# Altium PCB EMFI.PcbDoc
Units mm, origin at the board's own origin, x right, y up, seen from the top; angles counter-clockwise.
Board outline 128.02 x 45.55 mm, 2 copper layers (Top Layer, Bottom Layer); 90 components, 45 nets, 281 pads, 210 vias.
Unrouted connection lines stored in the file: 48.
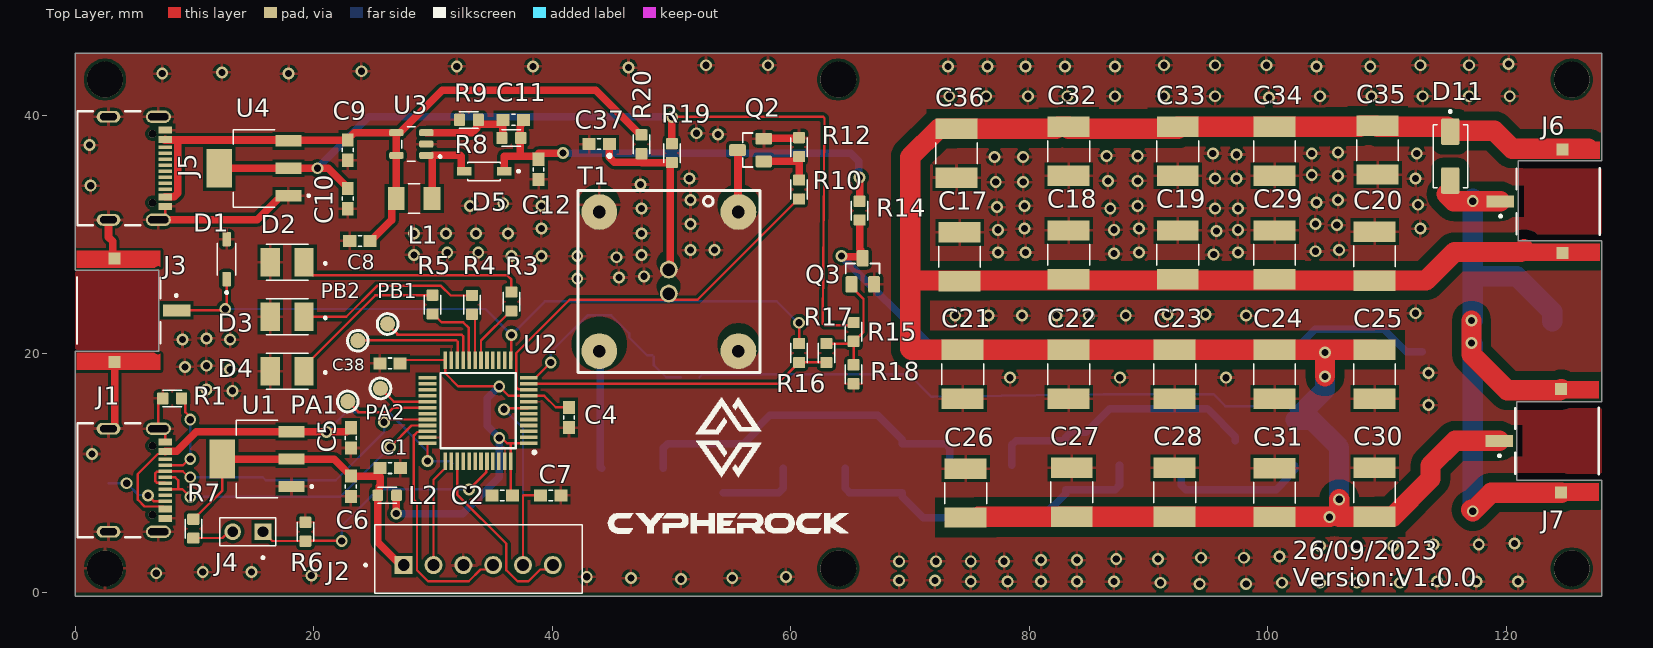
[diagram p0: Top Layer view]
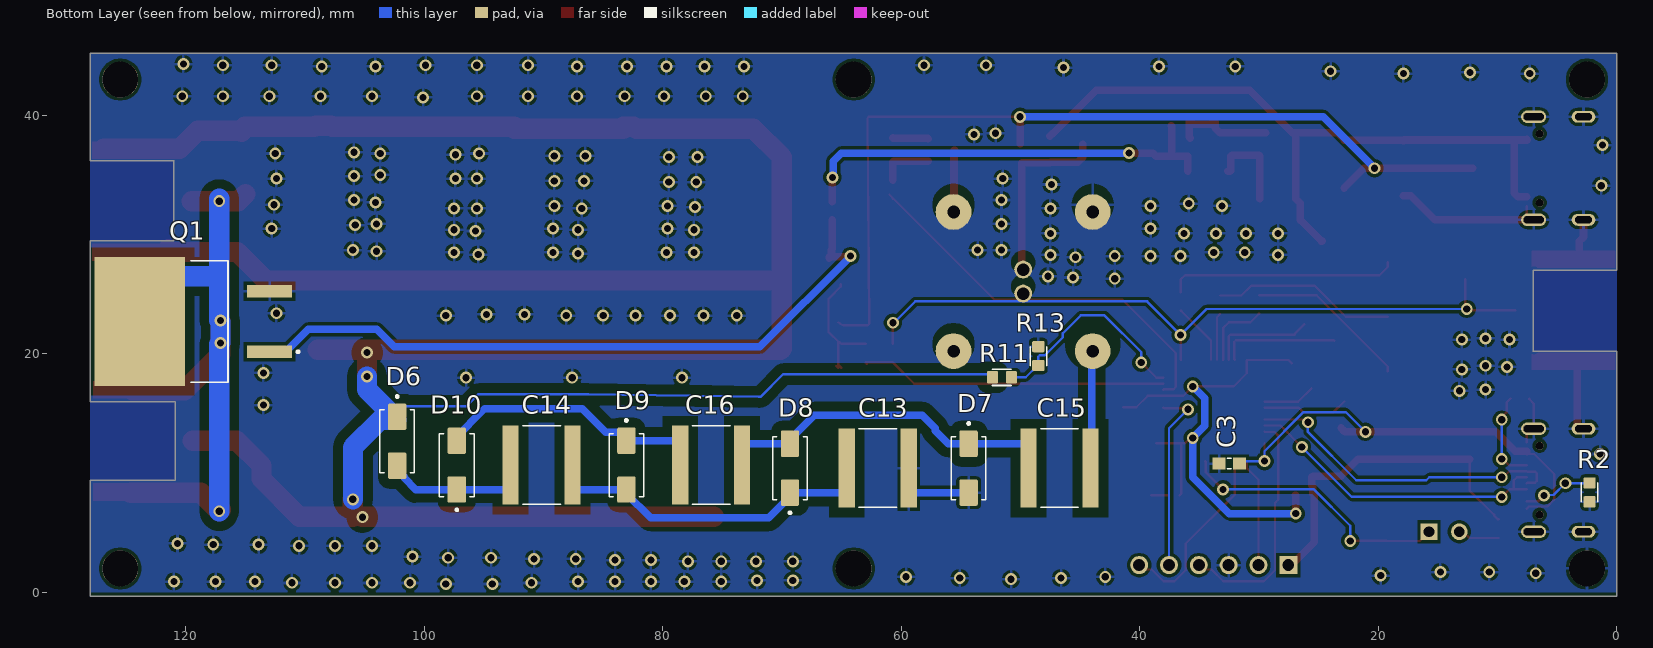
[diagram p1: Bottom Layer view, seen from below]
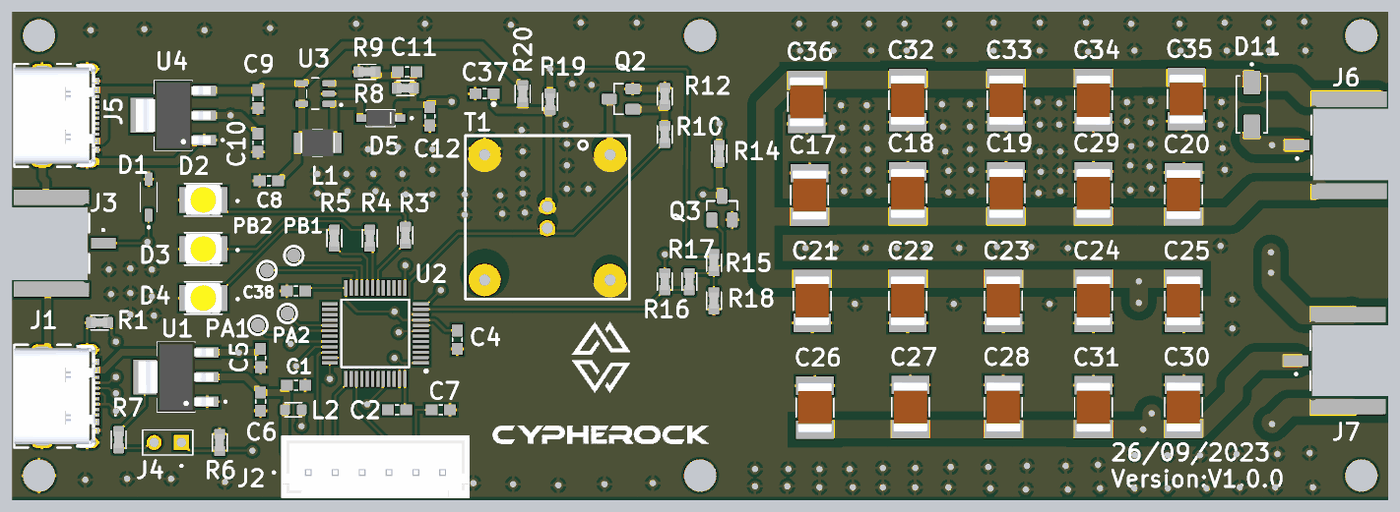
[diagram p2: 3D render of the assembled board from above, using the file's embedded part models]

## Layer stack, top to bottom
Top Solder: solder mask 0.0102, Solder Resist, Dk 3.5
Top Layer: signal copper 0.0356
Dielectric 1: dielectric 0.32, FR-4, Dk 4.8
Bottom Layer: signal copper 0.0356
Bottom Solder: solder mask 0.0102, Solder Resist, Dk 3.5

## Board outline
128.016,16 120.9,16 120.9,9.4 128.016,9.4 128.016,-0.339 0,-0.339 0,20.2 7,20.2 7,27 0,27 0,45.212 128.016,45.212 128.016,36.2 121,36.2 121,29.5 128.016,29.5

## Design rules (kind name [scope] priority, off if disabled: settings)
Clearance Clearance_2 [(InNet('NetC13_2') OR InNet('NetC14_2') OR InNet('NetC16_2') OR InNet('NetC15_2')  OR InNet('NetC15_1')  OR InNet('NetD11_A'))] p1: gap=0.8 ignorepadtopadclearanceinfootprint=FALSE
Clearance Clearance_1 [InNet('HV')] p2: gap=0.8 ignorepadtopadclearanceinfootprint=FALSE
Clearance [All] p3: gap=0.254 ignorepadtopadclearanceinfootprint=FALSE except(0: Arc-Hole Track-Hole SMDPad-Hole THPad-Hole Via-Hole Fill-Hole Poly-Hole Region-Hole Text-Hole; 0.15: Arc-SMDPad Track-SMDPad SMDPad-SMDPad; 0.2: Arc-Arc Arc-Track Track-Track)
ComponentClearance [All] p1: gap=0 collisioncheckmode=3 verticalgap=0.254 showdistances=FALSE
PlaneClearance [All] p1: clearance=0.8
PolygonConnect [All] p1: connectstyle=Relief reliefconductorwidth=0.254 reliefentries=4 polygonreliefangle="90 Angle" airgapwidth=0.254
RoutingVias [All] p1: holewidth=0.711 width=1.27 viastyle="Through Hole" minholewidth=0.711 minwidth=1.27 maxholewidth=0.711 maxwidth=1.27
SolderMaskExpansion [All] p1: expansion=0.102 istentingtop=FALSE
Width [All] p1: maxlimit=1.7 minlimit=0.2 preferedwidth=0.635 minimp=50.000000 maximp=50.000000 favimp=50.000000
28 further rules are at their usual default settings.

## Classes and differential pairs
component class Power: C8 C9 C10 C11 C12 C13 C14 C15 C16 C17 C18 C19 C20 C21 C22 C23 C24 C25 C26 C27 C28 C29 C30 C31 C32 C33 C34 C35 C36 C37 D5 D6 D7 D8 D9 D10 D11 J5 J6 J7 L1 Q1 Q2 Q3 R8 R9 R10 R11 R12 R13 R14 R15 R16 R17 R18 R19 R20 T1 U3 U4
component class Controller: C1 C2 C3 C4 C5 C6 C7 C38 D1 D2 D3 D4 J1 J2 J3 J4 L2 PA1 PA2 PB1 PB2 R1 R2 R3 R4 R5 R6 R7 U1 U2

## Components (designator, comment, footprint, x,y, rotation, side; value= is the part's Value field where it differs from the comment)
C1 "4.7uF/16V" CAPC1608X90 26.416,10.414 r0 top
C2 "1uF/16V" CAPC1608X90 35.814,8.128 r180 top
C3 "1uF/16V" CAPC1608X90 32.5,10.8 r0 bottom
C4 "1uF/16V" CAPC1608X90 41.41,14.664 r270 top
C5 "10uF/16V" CAPC1608X90 23.114,12.954 r270 top
C6 "10uF/16V" CAPC1608X90 23.114,8.89 r270 top
C7 "10uF/16V" CAPC1608X90 39.878,8.128 r0 top
C8 "10uF/16V" CAPC1608X90 23.876,29.464 r180 top
C9 "10uF/16V" CAPC1608X90 22.86,37.084 r270 top
C10 "10uF/16V" CAPC1608X90 22.86,33.02 r270 top
C11 "4.7pF/16V" CAPC1608X90 36.742,39.624 r180 top
C12 "4.7uF/16V" CAPC1608X90 38.862,35.472 r270 top
C13 "0.15uF/1000V" CAPC5563X218N 61.976,10.414 r0 bottom
C14 "0.15uF/1000V" CAPC5563X218N 90.17,10.668 r0 bottom
C15 "0.15uF/1000V" CAPC5563X218N 46.736,10.414 r0 bottom
C16 "0.15uF/1000V" CAPC5563X218N 75.946,10.668 r0 bottom
C17 "0.1uF/1000V" CAPC4632X221N 74.168,28.14 r270 top
C18 "0.1uF/1000V" CAPC4632X221N 83.312,28.294 r270 top
C19 "0.1uF/1000V" CAPC4632X221N 92.456,28.294 r270 top
C20 "0.1uF/1000V" CAPC4632X221N 108.966,28.194 r270 top
C21 "0.1uF/1000V" CAPC4632X221N 74.422,18.288 r90 top
C22 "0.1uF/1000V" CAPC4632X221N 83.312,18.288 r90 top
C23 "0.1uF/1000V" CAPC4632X221N 92.202,18.288 r90 top
C24 "0.1uF/1000V" CAPC4632X221N 100.584,18.288 r90 top
C25 "0.1uF/1000V" CAPC4632X221N 108.966,18.288 r90 top
C26 "0.1uF/1000V" CAPC4632X221N 74.676,8.328 r270 top
C27 "0.1uF/1000V" CAPC4632X221N 83.566,8.382 r270 top
C28 "0.1uF/1000V" CAPC4632X221N 92.202,8.382 r270 top
C29 "0.1uF/1000V" CAPC4632X221N 100.584,28.294 r270 top
C30 "0.1uF/1000V" CAPC4632X221N 108.966,8.382 r270 top
C31 "0.1uF/1000V" CAPC4632X221N 100.584,8.364 r270 top
C32 "0.1uF/1000V" CAPC4632X221N 83.312,36.984 r90 top
C33 "0.1uF/1000V" CAPC4632X221N 92.456,36.984 r90 top
C34 "0.1uF/1000V" CAPC4632X221N 100.584,36.984 r90 top
C35 "0.1uF/1000V" CAPC4632X221N 109.22,37.084 r90 top
C36 "0.1uF/1000V" CAPC4632X221N 73.914,36.83 r90 top
C37 "100uF/6.3V" CAPC1608X90 43.942,37.592 r180 top
C38 "1uF/16V" CAPC1608X90 26.4,19.2 r180 top
D1 "BZT52-C3V3" SOD3715X145N#1 12.7,27.94 r90 top
D2 "AA3528LSECKT/J4" LED_OF-SMD3528WC 17.78,27.686 r180 top
D3 "AA3528LSECKT/J4" LED_OF-SMD3528WC 17.78,23.114 r180 top
D4 "AA3528LSECKT/J4" LED_OF-SMD3528WC 17.78,18.542 r180 top
D5 "MBR0530T1G" SOD3715X145N#2 34.29,35.306 r180 top
D6 "M7" DIOM505270X240 102.278,12.668 r270 bottom
D7 "M7" DIOM505270X240 54.356,10.414 r270 bottom
D8 "M7" DIOM505270X240 69.342,10.414 r90 bottom
D9 "M7" DIOM505270X240 83.058,10.668 r270 bottom
D10 "M7" DIOM505270X240 97.282,10.668 r90 bottom
D11 "M7" DIOM505270X240 115.316,36.576 r270 top
J1 "USB4105-GF-A" GCT_USB4105-GF-A 2.794,9.398 r270 top
J2 "B6B-XH-A(LF)(SN)" JST_B6B-XH-A(LF)(SN) 33.802,2.811 r0 top
J3 "SMA-J-P-X-ST-EM3" SAMTEC_SMA-J-P-X-ST-EM3 0.152,23.644 r270 top
J4 "87224-2" TE_87224-2 14.478,5.08 r180 top
J5 "USB4105-GF-A" GCT_USB4105-GF-A 2.794,35.56 r270 top
J6 "SMA-J-P-X-ST-EM3" SAMTEC_SMA-J-P-X-ST-EM3 127.864,32.788 r90 top
J7 "SMA-J-P-X-ST-EM3" SAMTEC_SMA-J-P-X-ST-EM3 127.762,12.7 r90 top
L1 "6.8uH" INDM3225X240N 28.429,33.02 r180 top
L2 "MPZ1608S102ATD25" INDC1608X95N 26.162,8.128 r0 top
PA1 "5019" KEYSTONE_5019 22.86,16.002 r0 top
PA2 "5019" KEYSTONE_5019 25.6,17.1 r90 top
PB1 "5019" KEYSTONE_5019 26.2,22.5 r0 top
PB2 "5019" KEYSTONE_5019 23.7,21.1 r90 top
Q1 "IXGA30N120B3" TO254P1524X483-3N 119.38,22.708 r0 bottom
Q2 "IRLML6344TRPBF" SOT23 56.642,37.084 r90 top
Q3 "IRLML6344TRPBF" SOT23 66.04,26.924 r0 top
R1 "4.75k/0.1W" RESC1608X50N 8.128,16.256 r180 top
R2 "4.75k/0.1W" RESC1608X50N 2.286,8.382 r90 bottom
R3 "2k/0.1W" RESC1608X50N 36.576,24.384 r90 top
R4 "2k/0.1W" RESC1608X50N 33.274,24.112 r90 top
R5 "2k/0.1W" RESC1608X50N 29.972,24.13 r90 top
R6 "10k/0.1W" RESC1608X50N 19.304,5.08 r270 top
R7 "0E/0.1W" RESC1608X50N 9.906,5.334 r270 top
R8 "1.8M/0.1W" RESC1608X50N 36.576,38.1 r0 top
R9 "205k/0.1W" RESC1608X50N 33.02,39.624 r180 top
R10 "100E/0.1W" RESC1608X50N 60.706,33.782 r90 top
R11 "10M/0.1W" RESC1608X50N 51.562,18.034 r180 bottom
R12 "10k/0.1W" RESC1608X50N 60.706,37.338 r270 top
R13 "10k/0.1W" RESC1608X50N 48.514,19.812 r90 bottom
R14 "10k/0.1W" RESC1608X50N 65.786,32.004 r90 top
R15 "10k/0.1W" RESC1608X50N 65.278,21.844 r90 top
R16 "0E/0.1W DNP" RESC1608X50N 60.706,20.066 r270 top
R17 "100E/0.1W" RESC1608X50N 62.992,20.066 r90 top
R18 "10k/0.1W" RESC1608X50N 65.278,18.288 r90 top
R19 "0E/0.1W" RESC1608X50N 50.038,36.83 r270 top
R20 "0E/0.1W DNP" RESC1608X50N 47.498,37.574 r270 top
T1 "Component_1" PCBComponent_1 43.954,20.224 r0 top
U1 "TLV1117LV33" VREG_TLV1117LV33DCYR 15.24,11.176 r180 top
U2 "STM32L412C8T6" QFP50P900X900X160-48N 33.782,15.24 r180 top
U3 "TPS61040QDBVRQ1" SOT95P280X145-5N 28.194,37.592 r180 top
U4 "TLV1117LV33" VREG_TLV1117LV33DCYR 14.986,35.56 r180 top

## Footprints (in the part's own frame and the unit in brackets; to place one, negate y for a bottom-side part, rotate by r counter-clockwise, add the part's x,y. Pads: shape width x height; smd on the part's side, far side on the other; paste and mask are expansions set on the pad)
CAPC1608X90 [mm]
  rect 1.1x1 smd: 1(-0.85,0) 2(0.85,0)
  silkscreen extent -0.15,-0.45 0.15,0.45
CAPC4632X221N [mm]
  rect 1.71x3.51 smd: 1(-2.05,0) 2(2.05,0)
  silkscreen extent -0.88,-1.75 0.88,1.75, body extent -2.3,-1.6 2.3,1.6, height 2.8
CAPC5563X218N [mm]
  rect 1.36x6.61 smd: 1(-2.596,0) 2(2.596,0)
  silkscreen extent -1.59,-3.3 1.59,3.3
DIOM505270X240 [mm]
  rrect15% 2.21x1.53 smd: A(2.05,0) C(-2.05,0)
  silkscreen extent -3.85,-1.45 2.65,1.45
GCT_USB4105-GF-A [mm]
  rect 0.6x1.15 smd: A1_B12(-3.2,4.755) A4_B9(-2.4,4.755) B1_A12(3.2,4.755) B4_A9(2.4,4.755)
  rect 0.3x1.15 smd: A5(-1.25,4.755) A6(-0.25,4.755) A7(0.25,4.755) A8(1.25,4.755) B5(1.75,4.755) B6(0.75,4.755) B7(-0.75,4.755) B8(-1.75,4.755)
  oval 1.05x2.1 hole 0.6 slot 1.7 at 90 deg: S1(-4.32,4.18) S4(4.32,4.18)
  oval 1x2 hole 0.6 slot 1.4 at 90 deg: S2(-4.32,0) S3(4.32,0)
  round 0.65 hole 0.65 unplated: ""(-2.89,3.68) ""(2.89,3.68)
  silkscreen extent -4.79,-2.6 4.79,2.65, body extent -4.79,-2.6 4.79,5.11, height 3.31
INDC1608X95N [mm]
  rrect30% 0.9x0.97 smd: 1(-0.785,0) 2(0.785,0)
  silkscreen extent -0.8,-0.66 0.8,0.66
INDM3225X240N [mm]
  rect 1.41x1.91 smd: 1(-1.505,0) 2(1.505,0)
  silkscreen extent -0.48,-1.25 0.48,1.25, body extent -1.6,-1.25 1.6,1.25, height 2.4
JST_B6B-XH-A(LF)(SN) [mm]
  rect 1.508x1.508 hole 1: 1(-6.25,-0.525)
  round 1.508 hole 1: 2(-3.75,-0.525) 3(-1.25,-0.525) 4(1.25,-0.525) 5(3.75,-0.525) 6(6.25,-0.525)
  silkscreen extent -9.55,-2.88 8.7,2.88, body extent -8.7,-2.88 8.7,2.88, height 7
KEYSTONE_5019 [mm]
  round 1.27 smd: TP?(0,0)
  silkscreen extent -0.87,-0.87 0.87,0.87
LED_OF-SMD3528WC [mm]
  rect 1.6x2.4 smd: 1(-1.425,0) 2(1.425,0)
  silkscreen extent -3.3,-1.51 1.75,1.51, body extent -1.75,-1.4 1.75,1.4, height 1.9
PCBComponent_1 [mm]
  round 3 hole 1.05: 1(11.67,11.67) 3(11.67,0) 5(0,11.67) 6(0,0)
  round 1.5 hole 1.05: 2(5.83,6.84) 4(5.83,4.83)
  silkscreen extent -1.78,-1.78 13.46,13.46
QFP50P900X900X160-48N [mm]
  rect 1.475x0.3 smd: 1(-4.238,2.75) 2(-4.238,2.25) 3(-4.238,1.75) 4(-4.238,1.25) 5(-4.238,0.75) 6(-4.238,0.25) 7(-4.238,-0.25) 8(-4.238,-0.75) 9(-4.238,-1.25) 10(-4.238,-1.75) 11(-4.238,-2.25) 12(-4.238,-2.75) 25(4.238,-2.75) 26(4.238,-2.25) 27(4.238,-1.75) 28(4.238,-1.25) 29(4.238,-0.75) 30(4.238,-0.25) 31(4.238,0.25) 32(4.238,0.75) 33(4.238,1.25) 34(4.238,1.75) 35(4.238,2.25) 36(4.238,2.75)
  rect 0.3x1.475 smd: 13(-2.75,-4.238) 14(-2.25,-4.238) 15(-1.75,-4.238) 16(-1.25,-4.238) 17(-0.75,-4.238) 18(-0.25,-4.238) 19(0.25,-4.238) 20(0.75,-4.238) 21(1.25,-4.238) 22(1.75,-4.238) 23(2.25,-4.238) 24(2.75,-4.238) 37(2.75,4.238) 38(2.25,4.238) 39(1.75,4.238) 40(1.25,4.238) 41(0.75,4.238) 42(0.25,4.238) 43(-0.25,4.238) 44(-0.75,4.238) 45(-1.25,4.238) 46(-1.75,4.238) 47(-2.25,4.238) 48(-2.75,4.238)
  silkscreen extent -4.85,-3.15 3.15,3.62
RESC1608X50N [mm]
  rrect20% 0.94x1.02 smd: 1(-0.79,0) 2(0.79,0)
  silkscreen extent -0.8,-0.69 0.8,0.69, body extent -0.8,-0.4 0.8,0.4, height 0.23
SAMTEC_SMA-J-P-X-ST-EM3 [mm]
  rect 1x2.3 smd: 1(0,8.35)
  rect 1x1 smd: 2(-4.34,3.15) 3(4.34,3.15)
  Top Layer region: -3.661,6.99 -3.665,6.983 -3.669,6.975 -3.673,6.967 -3.677,6.96 -3.681,6.952 -3.684,6.944 -3.688,6.936 -3.691,6.927 -3.694,6.919 -3.696,6.911 -3.699,6.903 -3.701,6.894 -3.703,6.886 -3.705,6.877 -3.707,6.869 -3.708,6.86 -3.71,6.852 -3.711,6.843 -3.712,6.834 -3.712,6.826 -3.713,6.817 -3.713,6.808 -3.713,6.799 -3.713,6.791 -3.713,6.782 -3.712,6.773 -3.712,6.765 -3.711,6.756 -3.71,6.75 -3.708,6.737 -3.706,6.727 -3.704,6.717 -3.701,6.707 -3.699,6.697 -3.696,6.688 -3.693,6.678 -3.689,6.668 -3.686,6.658 -3.682,6.649 -3.678,6.639 -3.674,6.63 -3.669,6.621 -3.665,6.612 -3.66,6.603 -3.655,6.594 -3.649,6.585 -3.644,6.576 -3.638,6.568 -3.632,6.559 -3.626,6.551 -3.62,6.543 -3.613,6.535 -3.607,6.527 -3.6,6.519 -3.593,6.512 -3.586,6.504 -3.578,6.497 -3.571,6.49 -3.565,6.485 -3.56,6.485 -3.56,0 -5,0 -5,7 -3.655,7
  Top Layer region: 5,0 3.56,0 3.56,6.485 3.565,6.485 3.571,6.49 3.578,6.497 3.586,6.504 3.593,6.512 3.6,6.519 3.607,6.527 3.613,6.535 3.62,6.543 3.626,6.551 3.632,6.559 3.638,6.568 3.644,6.576 3.649,6.585 3.655,6.594 3.66,6.603 3.665,6.612 3.669,6.621 3.674,6.63 3.678,6.639 3.682,6.649 3.686,6.658 3.689,6.668 3.693,6.678 3.696,6.688 3.699,6.697 3.701,6.707 3.704,6.717 3.706,6.727 3.708,6.737 3.71,6.75 3.711,6.756 3.712,6.765 3.712,6.773 3.713,6.782 3.713,6.791 3.713,6.799 3.713,6.808 3.713,6.817 3.712,6.826 3.712,6.834 3.711,6.843 3.71,6.852 3.708,6.86 3.707,6.869 3.705,6.877 3.703,6.886 3.701,6.894 3.699,6.903 3.696,6.911 3.694,6.919 3.691,6.927 3.688,6.936 3.684,6.944 3.681,6.952 3.677,6.96 3.673,6.967 3.669,6.975 3.665,6.983 3.661,6.99 3.655,7 5,7
  silkscreen extent -2.8,0 2.8,8.43
SOD3715X145N#1 [mm]
  rrect25% 1.21x0.73 smd: A(1.68,0) C(-1.68,0)
  silkscreen extent -2.9,-0.77 1.35,0.77
SOD3715X145N#2 [mm]
  rect 1.21x0.72 smd: 1(-1.68,0) 2(1.68,0)
  silkscreen extent -2.99,-0.77 1.35,0.77, body extent -1.83,-0.77 1.83,0.77, height 0.74
SOT23 [mm]
  rrect30% 1x1.4 smd: 1(-0.95,-1.1) 2(0.95,-1.1) 3(0,1.1)
  silkscreen extent -1.42,-0.19 1.42,0.66
SOT95P280X145-5N [mm]
  rrect50% 1.21x0.59 smd: 1(-1.255,0.95) 2(-1.255,0) 3(-1.255,-0.95) 4(1.255,-0.95) 5(1.255,0.95)
  silkscreen extent -2.51,-1.45 0.8,1.45
TE_87224-2 [mil]
  rect 55x55 hole 35: 1(-50,0)
  round 55 hole 35: 2(50,0)
  silkscreen extent -92,-46 92,89
TO254P1524X483-3N [mm]
  rect 3.79x1.06 smd: 1(-6.4,2.54) 3(-6.4,-2.54)
  rect 7.62x10.84 smd paste-6: 2(4.48,0)
  silkscreen extent -8.89,-5.08 0.2,5.08
VREG_TLV1117LV33DCYR [mm]
  rect 2.15x0.95 smd: 1(-2.9,2.3) 2(-2.9,0) 3(-2.9,-2.3)
  rect 2.15x3.25 smd: 4(2.9,0)
  silkscreen extent -4.7,-3.25 1.75,3.25, body extent -3.5,-3.25 3.5,3.25, height 1.8

## Part data
C1 C2 C3 C4 C5 C6 C7 C8 C9 C10 C11 C12 C37 C38: library part CC0603MRX5R7BB106, "CAP CER 10UF 16V X5R 0603", Package=None, Availability=Unavailable, MP=CC0603MRX5R7BB106, Price=None
C13 C14 C15 C16: library part VJ2225Y104KBGAT4X, Package=None, Availability=Unavailable, MP=VJ2225Y104KBGAT4X, Price=None
C17 C18 C19 C20 C21 C22 C23 C24 C25 C26 C27 C28 C29 C30 C31 C32 C33 C34 C35 C36: library part 1812CC104KAZ1A, "1812", Package="4632 AVX", Availability="In Stock", Check_prices=https://www.snapeda.com/parts/1812CC104KAZ1A/AVX/view-part/?ref=eda, MF=AVX, MP=1812CC104KAZ1A, Price=None, Purchase-URL=https://pricing.snapeda.com/search/part/1812CC104KAZ1A/?ref=eda, SnapEDA_Link=https://www.snapeda.com/parts/1812CC104KAZ1A/AVX/view-part/?ref=snap
D1: library part BZT52C3V9-7-F, "SOD-123", Package="SOD-123 Diodes Inc.", Availability=Unavailable, MF="Diodes Inc.", MP=BZT52C3V9-7-F, Price=None, SnapEDA_Link=https://www.snapeda.com/parts/BZT52C3V9-7-F/Diodes%20Inc./view-part/270582/?ref=snap
D2 D3 D4: library part OF-SMD3528WC, "PLCC2", Package="PLCC-2 Optoflash", Availability="Not in stock", Check_prices=https://www.snapeda.com/parts/OF-SMD3528WC/Optoflash/view-part/?ref=eda, MF=Optoflash, MP=OF-SMD3528WC, Price=None, SnapEDA_Link=https://www.snapeda.com/parts/OF-SMD3528WC/Optoflash/view-part/?ref=snap
D5: library part BAT46W-7-F, "SOD-123", Package="SOD-123 Fairchild Semiconductor", Availability="In Stock", Check_prices=https://www.snapeda.com/parts/BAT46W-7-F/Diodes+Inc./view-part/?ref=eda, MF="Diodes Inc.", MP=BAT46W-7-F, Price=None, Purchase-URL=https://pricing.snapeda.com/search/part/BAT46W-7-F/?ref=eda, SnapEDA_Link=https://www.snapeda.com/parts/BAT46W-7-F/Diodes+Inc./view-part/?ref=snap
D6 D7 D8 D9 D10 D11: "Diode Standard 1000 V 1A Surface Mount DO-214AC (SMA)", Package="DO-214AC-2 Diotec", Availability="In Stock", Check_prices=https://www.snapeda.com/parts/M7/Diotec/view-part/?ref=eda, MF="Diotec Semiconductor", MP=M7, Price=None, Purchase-URL=https://pricing.snapeda.com/search/part/M7/?ref=eda, SnapEDA_Link=https://www.snapeda.com/parts/M7/Diotec/view-part/?ref=snap
J1 J5: "USB-C (USB TYPE-C) USB 2.0 Receptacle Connector 24 (16+8 Dummy) Position Surface Mount, Right Angle; Through Hole", Package=None, Availability="In Stock", Check_prices=https://www.snapeda.com/parts/USB4105-GF-A/Global+Connector+Technology/view-part/?ref=eda, MF=GCT, MP=USB4105-GF-A, Price=None, Purchase-URL=https://pricing.snapeda.com/search/part/USB4105-GF-A/?ref=eda, SnapEDA_Link=https://www.snapeda.com/parts/USB4105-GF-A/Global+Connector+Technology/view-part/?ref=snap
J2: "Connector Header Through Hole 6 position 0.098 (2.50mm)", Package=None, Availability="In Stock", Check_prices=https://www.snapeda.com/parts/B6B-XH-A(LF)(SN)/JST+Sales+America+Inc./view-part/?ref=eda, MF="JST Sales", MP=B6B-XH-A(LF)(SN), Price=None, Purchase-URL=https://pricing.snapeda.com/search/part/B6B-XH-A(LF)(SN)/?ref=eda, SnapEDA_Link=https://www.snapeda.com/parts/B6B-XH-A(LF)(SN)/JST+Sales+America+Inc./view-part/?ref=snap
J3 J6 J7: "RF Connectors / Coaxial Connectors", Package=None, Availability=Unavailable, MF=Samtec, MP=SMA-J-P-X-ST-EM3, Price=None
J4: "Connector Unshrouded Header HDR 2 Position 2.54mm Solder Straight Thru-Hole", Package=None, Availability=Unavailable, Centerline_Pitch="2.54 mm[.1 in]", EU_RoHS_Compliance=Compliant, MF="TE Connectivity", MP=87224-2, Number_of_Positions=2, Price=None, Product_Type=Connector, SnapEDA_Link=https://www.snapeda.com/parts/87224-2/TE%20Connectivity%20AMP%20Connectors/view-part/494877/?ref=snap, TE_purchase_URL=https://www.te.com/usa-en/product-87224-2.html?te_bu=Cor&te_type=disp&te_campaign=seda_glo_cor-seda-global-disp-prtnr-fy19-seda-model-bom-cta_sma-317_1&elqCampaignId=32493
L1: library part NLCV32T-6R8M-EFR, "1210", Package="SMD-2 TDK", Check_prices=https://www.snapeda.com/parts/NLCV32T-6R8M-EFR/TDK/view-part/?ref=eda, Digi-Key_Part_Number=445-16406-2-ND, MF=TDK, MP=NLCV32T-6R8M-EFR, Purchase-URL=https://pricing.snapeda.com/search/part/NLCV32T-6R8M-EFR/?ref=eda, SnapEDA_Link=https://www.snapeda.com/parts/NLCV32T-6R8M-EFR/TDK/view-part/?ref=snap
L2: library part MMZ1608Y150B, "0603", Package=None, Availability=Unavailable, MP=MMZ1608Y150B, Price=None
PA1 PA2 PB1 PB2: "SMT Test Point- Mininature-1000 pc Reels", Package=None, Availability="In Stock", MF="Keystone Electronics", MP=5019, Price=None, Purchase-URL=https://pricing.snapeda.com/search/part/5019/?ref=eda
Q1: library part ISL9V5045S3ST, "TO-263-3", Package=None, Availability=Unavailable, MP=ISL9V5045S3ST, Price=None
Q2 Q3: library part MMBF170, "SOT-23-3", Package="SOT-23 ON Semiconductor", Availability=Unavailable, MF="ON Semiconductor", MP=MMBF170, Price=None, SnapEDA_Link=https://www.snapeda.com/parts/MMBF170/ON%20Semiconductor/view-part/1400962/?ref=snap
R1 R2 R3 R4 R5 R6 R7 R8 R9 R10 R11 R12 R13 R14 R15 R16 R17 R18 R19 R20: library part 3-1879460-5, "RES 0.27 OHM 1% 1/10W 0603", Package=0603, Power_Rating=".1 W", Resistance=27, Tolerance=1%, Availability="In Stock", Check_prices=https://www.snapeda.com/parts/3-1879460-5/TE+Connectivity/view-part/?ref=eda, EU_RoHS_Compliance="Compliant with Exemptions", MF="TE Connectivity", MP=3-1879460-5, Price=None, SnapEDA_Link=https://www.snapeda.com/parts/3-1879460-5/TE+Connectivity/view-part/?ref=snap
U1 U4: library part TLV1117LV33DCYR, "1-A, low-dropout voltage regulator", Package="SOT-223-4 Texas Instruments", Check_prices=https://www.snapeda.com/parts/TLV1117LV33DCYR/Texas+Instruments/view-part/?ref=eda, Digi-Key_Part_Number=296-28778-2-ND, MF="Texas Instruments", MP=TLV1117LV33DCYR, Purchase-URL=https://pricing.snapeda.com/search/part/TLV1117LV33DCYR/?ref=eda, SnapEDA_Link=https://www.snapeda.com/parts/TLV1117LV33DCYR/Texas+Instruments/view-part/?ref=snap
U2: "STMICROELECTRONICS - STM32L412C8T6 - MCU, 32BIT, 80MHZ", Manufacturer_Name=STMicroelectronics, Arrow Part Number=STM32L412C8T6, Arrow Price/Stock=https://www.arrow.com/en/products/stm32l412c8t6/stmicroelectronics?region=nac, Datasheet Link=https://www.arrow.com/en/products/stm32l412c8t6/stmicroelectronics?region=nac, Geometry.Height=1.6mm, Manufacturer_Part_Number=STM32L412C8T6
U3: Package=None, Availability=Unavailable, MP=TPS61040QDBVRQ1, Price=None

## Free pads (board coordinates)
  round 3 hole 3: 2(125.5,43) 3(125.5,2) 4(2.5,2) 5(2.5,43) 6(64,2) 7(64,43)

## Via types
v1: diameter 1, hole 0.6, Top Layer to Bottom Layer, tented top, 210 vias

## Nets (pads, with @x,y where several pads share a name; then routed paths per layer and width w, separated by ;. In a path a pad name is that pad's centre, name@x,y a point inside that pad or via, vN(x,y) a via of type N, cw(c..) or ccw(c..) an arc to the next point about the centre after c; other vN are vias at no path point)
3V3: C10.1 R15.2 R19.1 U4.2 U4.4 | length 78.1
  Top Layer w0.2: v1(50.038,39.878) 62.722,39.878 62.839,39.761 62.839,39.675 62.697,22.595 62.697,22.512 62.814,22.395 64.893,22.395 R15.2@65.278,22.624
  Top Layer w0.635: U4.4 U4.2 v1(20.32,35.56) 21.22,35.56 22.86,33.92 C10.1 ; R19.1@50.038,37.61 v1(50.038,39.878)
  Bottom Layer w0.635: v1(20.32,35.56) 24.638,39.878 v1(50.038,39.878)
5V: C8.1 C9.1 J5.A4_B9 J5.B4_A9 L1.2 R20.1 U3.4 U3.5 U4.3 | length 59.3
  Top Layer w0.635: J5.B4_A9 7.566,33.178 8.303,33.178 8.591,33.466 8.591,37.72 8.382,37.93 ; J5.A4_B9@7.566,37.978 J5.A4_B9 7.519,37.93 8.382,37.93 ; C8.1 24.776,29.464 26.537,31.224 26.537,32.633 L1.2 26.932,33.028 26.932,36.634 U3.5 U3.4 ; R20.1@47.565,38.237 47.33,38.472 47.298,38.472 43.654,42.116 30.778,42.116 27.204,38.542 U3.4 ; 8.382,37.93 17.816,37.93 U4.3 17.923,37.897 22.823,37.897 C9.1 22.86,37.984 23.418,38.542 U3.4
12V: C11.1 C12.1 D5.1 R8.2 R14.2 | length 37.4
  Top Layer w0.635: D5.1 35.97,36.576 37.314,36.576 ; 37.356,39.116 37.314,39.074 37.314,38.1 37.314,36.576 ; v1(40.894,36.83) 38.862,36.83 38.862,36.78 38.658,36.576 37.314,36.576 ; R14.2@65.786,32.737 v1(65.786,34.798)
  Bottom Layer w0.635: v1(40.894,36.83) 65.024,36.83 65.716,36.138 65.716,34.868 v1(65.786,34.798)
FB: C11.2 R8.1 R9.1 U3.3 | length 9
  Top Layer w0.635: U3.3 33.286,38.542 33.657,38.914 33.657,39.471 R9.1 ; R9.1@33.8,39.574 34.115,39.259 35.477,39.259 35.659,39.441 35.709,39.441 C11.2@35.839,39.571 ; R8.1 35.839,38.153 C11.2@35.839,39.571 ; C11.2@35.844,39.624 35.844,39.576 C11.2@35.839,39.571
GND: C1.2 C3.2 C4.2 C5.2 C6.2 C7.2 C8.2 C9.2 C10.2 C12.2 C13.1 C17.1 C18.1 C19.1 C20.1 C21.1 C22.1 C23.1 C24.1 C25.1 C26.1 C27.1 C28.1 C29.1 C30.1 C31.1 C32.1 C33.1 C34.1 C35.1 C36.1 C37.2 C38.2 D1.A D2.2 D3.2 D4.2 D7.A J1.A1_B12 J1.B1_A12 J1.S1 J1.S2 J1.S3 J1.S4 J2.3 J3.2 J3.3 J5.A1_B12 J5.B1_A12 J5.S1 J5.S2 J5.S3 J5.S4 pad.4 Q1.3 Q2.2 Q3.2 R1.2 R2.1 R6.1 R9.2 R12.1 R13.2 R18.1 T1.5 U1.1 U2.8 U2.23 U2.35 U2.47 U3.2 U4.1 | length 39
  Top Layer w0.2: J1.S3@2.294,5.078 J1.S3 ; J5.S4 7.156,31.24 7.549,31.633 J5.B1_A12 ; R1.2@7.348,16.256 7.348,16.206 6.974,15.832 J1.S1 7.156,13.718 7.549,13.325 J1.A1_B12
  Top Layer w0.635: J1.S2 3.133,13.718 3.302,13.887 J3.3 ; J5.S3 2.794,29.782 3.139,29.436 3.139,28.147 J3.2 ; J5.S4 J5.S4@7.094,31.36 ; J5.S4@7.156,31.24 15.266,31.24 17.286,33.26 U4.1 ; T1.5@43.092,32.472 43.954,31.61 T1.5@43.954,30.97 ; Q2.2 57.784,38.076 60.664,38.076 R12.1@60.706,38.118
  Bottom Layer w0.635: D7.A 59.017,8.364 59.38,8.727 C13.1
  other v1: 94.3,0.7 98.2,0.7 91,0.8 101.2,0.8 104.4,0.8 107.5,0.8 111.1,0.8 75.1,0.9 78.2,0.9 81,0.9 84,0.9 87.1,0.9 114.2,0.9 117.5,0.9 121,0.9 69.1,1 72.1,1 50.8,1.1 46.6,1.2 55.1,1.2 42.9,1.3 59.6,1.3 19.8,1.4 6.8,1.6 10.7,1.7 14.8,1.7 69.1,2.6 72.2,2.6 75.1,2.6 77.9,2.6 81,2.7 84,2.7 87.3,2.8 90.8,2.8 94.4,2.9 98,2.9 101,3 104.4,3.9 107.5,3.9 110.5,3.9 113.9,4 117.7,4 120.7,4.1 1.4,11.6 113.5,15.7 13.2,16.9 11,17 78.4,18 87.6,18 96.5,18 113.5,18.4 13,18.7 9.2,18.9 11,19 9,21.2 13,21.2 11,21.3 73.8,23.2 76.6,23.2 79.4,23.2 82.3,23.2 85,23.2 88.1,23.2 98.2,23.2 91.6,23.3 94.8,23.3 112.4,23.4 42.1,26.3 45.6,26.4 47.7,26.5 45.4,28.1 36.6,28.2 39.1,28.2 42.1,28.2 28.4,28.3 47.5,28.3 95.473,28.327 87.1,28.4 31.2,28.5 33.8,28.5 77.4,28.5 79.7,28.5 89.2,28.5 97.5,28.5 104,28.6 51.6,28.7 53.6,28.7 106,28.7 28.4,30.1 31.1,30.1 33.6,30.1 36.3,30.1 47.5,30.1 95.7,30.3 77.4,30.4 87.1,30.4 97.5,30.4 39.1,30.5 79.6,30.5 89.2,30.5 112.8,30.5 105.8,30.8 51.6,30.9 104,30.9 47.5,32.2 86.8,32.2 95.6,32.2 97.5,32.2 77.3,32.3 33.1,32.4 39.1,32.4 79.6,32.4 89.1,32.4 112.6,32.5 35.9,32.6 104.1,32.7 51.6,32.9 105.9,32.9 1.3,34.1 47.4,34.2 77.2,34.4 79.5,34.4 86.6,34.5 89.1,34.5 51.5,34.7 95.6,34.7 97.4,34.7 112.4,34.7 105.9,34.9 103.7,35 77.1,36.5 79.5,36.5 86.5,36.6 89.1,36.6 97.4,36.7 95.4,36.8 103.7,36.8 112.5,36.8 105.9,36.9 1.2,37.5 53.9,38.4 52.1,38.5 100.1,41.5 73.3,41.6 76.4,41.6 79.9,41.6 83.2,41.6 87.2,41.6 91.3,41.6 95.6,41.6 104.4,41.6 108.7,41.6 113,41.6 116.9,41.6 120.3,41.6 7.3,43.5 17.9,43.5 12.3,43.6 24,43.7 46.4,44 32,44.1 38.4,44.1 73.2,44.1 76.5,44.1 79.7,44.1 83,44.1 87.2,44.1 104.1,44.1 108.6,44.1 52.9,44.2 58.1,44.2 91.3,44.2 95.6,44.2 99.9,44.2 112.8,44.2 116.9,44.2 120.2,44.3
HV: C17.2 C18.2 C19.2 C20.2 C21.2 C22.2 C23.2 C24.2 C25.2 C26.2 C27.2 C28.2 C29.2 C30.2 C31.2 C32.2 C33.2 C34.2 C35.2 C36.2 D6.C D11.C J6.2 J6.3 J7.1 R11.1 | length 280
  Top Layer w1.7: C26.2@75.73,6.332 C27.2 C28.2 v1@105.2,6.332 ; C32.2@83.312,38.88 C33.2@92.456,38.88 ; C32.2 82.412,39.034 82.258,38.88 C36.2 73.909,38.875 72.401,38.875 70.039,36.513 70.039,26 ; C33.2 C34.2 104.993,39.034 105.009,39.05 107.728,39.05 107.807,39.129 C35.2@109.12,39.129 ; v1(104.8,18.1) v1(104.8,20.1) ; 106,6.332 C30.2 108.971,6.337 110.479,6.337 113.656,9.513 113.656,10.644 115.712,12.7 J7.1 ; 106,7.1 v1(106,7.8) ; C25.2 C24.2 C23.2 C22.2 C21.2 70.101,20.338 70.039,20.4 70.039,26 ; C35.2@109.22,39.034 115.078,39.034 115.316,38.796 D11.C 115.39,38.7 119,38.7 120.5,37.2 126.9,37.2 ; 121.5,28.8 121.248,28.548 115.675,28.548 113.271,26.144 C20.2 70.183,26.144 70.039,26
  Bottom Layer w0.2: R11.1 52.618,18.3 69.9,18.3 71.813,16.388 71.978,16.388 86.236,16.618 87.379,16.618 ccw(c87.6,18) 87.821,16.618 95.444,16.618 96.454,15.608 101.614,15.608 102.278,14.944 D6.C
  Bottom Layer w1.7: D6.C@102.363,14.463 103.676,14.463 105.986,12.154 v1@105.986,7.8 ; D6.C@102.773,14.973 104.8,17 v1(104.8,18.1)
  other v1: 105.2,6.3
NetC7_1: C7.1 J2.5 U2.7 | length 23.7
  Top Layer w0.2: v1(35.959,15.349) 36.05,15.44 37.97,15.44 U2.7 ; J2.5@37.552,2.032 37.552,8.128 C7.1
  Bottom Layer w0.2: v1(35.959,15.349) 37.552,13.756 J2.5@37.552,2.032
NetC13_2: C13.2 C14.1 D8.C D9.A | length 28.9
  Bottom Layer w0.635: C13.2 64.572,8.727 64.935,8.364 D8.C 69.342,8.024 71.12,6.245 81.026,6.245 83.058,8.278 D9.A 87.211,8.618 87.574,8.981 C14.1
NetC14_2: C14.2 D6.A D10.C | length 12.4
  Bottom Layer w0.635: C14.2 92.766,8.981 93.129,8.618 D10.C 100.7,8.618 101.692,9.61 101.692,9.692 102.278,10.278 D6.A
NetC15_1: C15.1 T1.6 | length 10.6
  Top Layer w0.635: T1.6@43.954,20.824 T1.6@44.047,20.731
  Bottom Layer w0.635: T1.6@43.954,20.824 44.047,20.731 44.047,10.507 C15.1
NetC15_2: C15.2 C16.1 D7.C D8.A | length 29.7
  Bottom Layer w0.635: C15.2 49.332,12.101 49.695,12.464 D7.C 56.073,12.464 57.155,13.546 57.155,13.755 58.237,14.837 67.31,14.837 69.342,12.804 D8.A 72.987,12.464 73.35,12.101 C16.1
NetC16_2: C16.2 D9.C D10.A | length 23.2
  Bottom Layer w0.635: C16.2 78.542,12.355 78.905,12.718 D9.C 83.058,12.987 83.505,13.435 84.775,13.435 86.741,15.4 87.298,15.4 ccw(c87.6,18) 87.902,15.4 94.94,15.4 95.126,15.214 97.282,13.058 D10.A
NetC37_1: C37.1 R19.2 R20.2 T1.2 | length 14.8
  Top Layer w0.635: C37.1 44.792,36.47 45.212,36.05 47.48,36.05 47.498,36.032 49.87,36.032 49.911,35.991 T1.2@49.911,27.664
NetD1_C: D1.C J3.1 R16.1 U2.13 | length 61.5
  Top Layer w0.2: J3.1 12.468,23.644 v1(12.584,23.76) 12.7,23.876 D1.C ; U2.13 36.554,19.5 36.554,21.568 v1(36.576,21.59) ; R16.1@60.706,20.846 v1(60.706,22.606)
  Bottom Layer w0.2: v1(12.584,23.76) 34.406,23.76 v1(36.576,21.59) 39.386,24.4 58.833,24.4 60.627,22.606 v1(60.706,22.606)
NetD2_1: D2.1 R3.2 | length 19.3
  Top Layer w0.2: D2.1 19.205,27.286 19.905,26.586 36.214,26.586 36.576,26.224 R3.2
NetD3_1: D3.1 R4.2 | length 15.5
  Top Layer w0.2: D3.1 22.735,23.114 25.321,25.7 30.68,25.7 31.488,24.892 R4.2@33.274,24.892
NetD4_1: D4.1 R5.2 | length 13.6
  Top Layer w0.2: D4.1 19.205,18.942 25.173,24.91 R5.2@29.972,24.91
NetD5_2: D5.2 L1.1 U3.1 | length 7.5
  Top Layer w0.635: L1.1 29.934,36.604 29.972,36.642 32.299,36.642 32.365,36.576 32.365,35.349 32.408,35.306 D5.2
NetD11_A: D11.A J6.1 J7.2 J7.3 Q1.2 | length 59.7
  Top Layer w1.7: 115,33.4 115.612,32.788 J6.1 ; v1@117.069,6.931 v1(117.2,6.8) 118.76,8.36 J7.2 ; v1(117.1,22.8) 117.1,19.94 120.1,16.94 124.512,16.94 J7.3
  Bottom Layer w1.7: v1(117.2,6.8) 117.2,20.8 v1(117.1,20.9) 117.1,22.7 117.2,22.8 117.2,26.5 ; v1@117.2,33 117.2,26.5 ; Q1.2 123.86,23.54 120.9,26.5 117.2,26.5
  other v1: 117.2,32.8
NetJ1_A5: J1.A5 R1.1 | length 7.7
  Top Layer w0.2: J1.A5 7.559,10.658 9.039,10.658 9.557,11.176 v1(9.652,11.176) ; R1.1@8.908,16.256 9.243,15.921 9.243,15.103 9.652,14.694 v1(9.652,14.478)
  Bottom Layer w0.2: v1(9.652,11.176) v1(9.652,14.478)
NetJ1_A6: J1.A6 J1.B6 U2.33 | length 26.7
  Top Layer w0.2: J1.B6 8.624,8.648 ; J1.A6 7.553,9.652 8.382,9.652 8.636,9.398 8.636,8.66 8.624,8.648 ; v1(9.652,7.999) 9.003,8.648 8.624,8.648 ; v1(26.416,12.192) 28.214,13.99 U2.33
  Bottom Layer w0.2: v1(9.652,7.999) 22.223,7.999 v1(26.416,12.192)
NetJ1_A7: J1.A7 J1.B7 U2.32 | length 27.3
  Top Layer w0.2: J1.A7 7.508,9.189 6.841,9.189 6.724,9.307 6.724,9.989 6.841,10.107 7.508,10.107 J1.B7 9.017,10.148 9.513,9.652 v1(9.652,9.652) ; v1(25.908,14.263) 26.124,14.263 26.351,14.49 U2.32
  Bottom Layer w0.2: v1(9.652,9.652) 15.729,9.652 15.983,9.398 21.844,9.398 25.809,13.363 25.908,13.462 v1(25.908,14.263)
NetJ1_B5: J1.B5 R2.2 | length 5.4
  Top Layer w0.2: v1(6.096,8.128) 6.576,7.648 J1.B5
  Bottom Layer w0.2: R2.2@2.794,9.162 2.812,9.144 v1(4.318,9.144) 5.296,8.166 6.058,8.166 v1(6.096,8.128)
NetJ2_2: J2.2 U2.37 | length 9.4
  Top Layer w0.2: J2.2@30.052,2.032 30.052,9.434 31.032,10.414 U2.37
NetJ2_4: J2.4 U2.34 | length 19.9
  Top Layer w0.2: U2.34 29.494,13.44 28.682,13.44 28.4,13.158 28.4,7.759 28.66,7.499 28.66,1.857 29.593,0.924 33.011,0.924 33.998,1.911 34.931,1.911 J2.4@35.052,2.032
NetJ2_6: J2.6 U2.39 | length 15.6
  Top Layer w0.2: U2.39 32.032,8.2 36.16,4.072 36.16,1.857 37.093,0.924 38.011,0.924 38.998,1.911 39.931,1.911 J2.6@40.052,2.032
NetJ4_1: J4.1 R6.2 U2.44 | length 22.9
  Top Layer w0.2: J4.1 16.528,4.3 19.304,4.3 19.322,4.318 v1(22.352,4.318) ; v1(33.02,8.636) 34.482,10.098 34.482,10.952 U2.44
  Bottom Layer w0.2: v1(22.352,4.318) 22.352,5.588 25.4,8.636 v1@32.766,8.636
NetJ4_2: J4.2 R7.2 | length 3.5
  Top Layer w0.2: R7.2@9.906,4.554 12.358,4.554 12.884,5.08 J4.2
NetPA1_TP?: PA1.TP? U2.30 | length 7.2
  Top Layer w0.2: PA1.TP? 23.745,15.117 26.309,15.117 26.682,15.49 U2.30
NetPA2_TP?: PA2.TP? U2.29 | length 4.4
  Top Layer w0.2: PA2.TP? 26.71,15.99 U2.29
NetPB1_TP?: PB1.TP? U2.21 | length 8.8
  Top Layer w0.2: PB1.TP? 27,21.7 27,21.59 32.415,21.59 32.532,21.473 U2.21
NetPB2_TP?: PB2.TP? U2.22 | length 10
  Top Layer w0.2: PB2.TP? 23.736,21.136 31.961,21.136 32.078,21.019 32.078,19.524 U2.22
NetQ1_1: Q1.1 Q3.3 R14.1 | length 58.4
  Top Layer w0.635: v1(64.262,28.194) 64.332,28.124 Q3.3@66.04,28.124 ; R14.1@65.786,31.224 65.786,28.778 65.857,28.707 65.857,28.207 Q3.3
  Bottom Layer w0.635: v1(64.262,28.194) 71.856,20.6 102.518,20.6 103.985,22.068 109.716,22.068 111.615,20.168 Q1.1
NetQ2_1: Q2.1 R10.2 R12.2 | length 4.5
  Top Layer w0.635: Q2.1 60.64,36.134 60.706,36.068 R10.2@60.706,34.562
NetQ2_3: Q2.3 T1.1 | length 4.6
  Top Layer w0.635: Q2.3 55.583,37.043 T1.1@55.583,32.494
NetQ3_1: Q3.1 R15.1 R17.2 R18.2 | length 10.4
  Top Layer w0.2: R17.2@62.992,20.846 65.06,20.846 65.169,20.955 R15.1@65.219,20.955 ; R18.2@65.024,18.814 R18.2@65.26,19.05 ; Q3.1 65.09,25.624 66.106,24.608 66.106,21.842 65.278,21.014 R18.2@65.278,19.068 ; R18.2@65.278,18.814 R18.2@65.448,18.984
NetR3_1: R3.1 U2.18 | length 5.2
  Top Layer w0.2: U2.18 34.032,21.11 36.526,23.604 R3.1@36.576,23.604
NetR4_1: R4.1 U2.19 | length 4
  Top Layer w0.2: R4.1@33.274,23.332 33.532,23.074 U2.19
NetR5_1: R5.1 U2.20 | length 6.2
  Top Layer w0.2: R5.1@29.972,23.35 30.022,23.35 30.729,22.643 32.535,22.643 33.02,22.158 33.02,19.49 U2.20
NetR10_1: R10.1 U2.10 | length 33.5
  Top Layer w0.2: U2.10 37.97,17.04 37.158,17.04 36.982,17.216 36.982,20.061 41.471,24.55 52.204,24.55 R10.1@60.656,33.002 ; R10.1@60.706,33.002 R10.1@60.656,33.002 ; R10.1@60.991,33.337 R10.1@60.656,33.002
NetR11_2: R11.2 R13.1 U2.12 | length 18.2
  Top Layer w0.2: U2.12 38.608,17.99 v1(39.878,19.26)
  Bottom Layer w0.2: v1(39.878,19.26) 39.878,20.142 42.96,23.224 44.948,23.224 46.452,21.72 46.452,21.386 47.956,19.882 48.397,19.882 48.514,19.765 R13.1@48.514,19.032 ; R13.1 R13.1@48.514,19.032 ; R11.2@50.782,18.034 49.562,18.034 48.564,19.032 R13.1@48.514,19.032
NetR16_2: R16.2 R17.1 U2.11 | length 25.8
  Top Layer w0.2: U2.11 58.92,17.49 R16.2 ; R16.2@60.706,19.286 R17.1@62.992,19.286 ; R17.1@62.9,19.184 R17.1
VDD: C1.1 C6.1 J2.1 L2.1 R7.1 U1.2 U1.4 | length 28.6
  Top Layer w0.2: R7.1@9.906,6.114 9.956,6.114 10.291,6.449 10.291,6.499 12.34,8.548 U1.4
  Top Layer w0.635: U1.4 U1.2 21.728,11.176 23.114,9.79 C6.1 25.514,9.74 25.566,9.688 25.566,8.961 25.51,8.905 25.51,8.261 L2.1 25.377,4.207 J2.1@27.552,2.032
VDD_MCU: C2.1 C4.1 C38.1 L2.2 U2.1 U2.9 U2.24 U2.48 | length 44.1
  Top Layer w0.2: C38.1 27.528,19.478 U2.24 31.032,18.368 32.128,17.272 v1(35.56,17.272) 36.342,16.49 U2.9 39.321,16.49 40.297,15.514 C4.1 ; v1(35.56,12.954) 35.763,12.954 36.227,12.49 36.494,12.49 ; C2.1 36.532,8.26 U2.48 36.532,12.452 36.494,12.49 ; U2.1@38.608,12.49 U2.1 36.494,12.49
  Top Layer w0.635: v1(26.924,6.604) 26.936,6.616 26.936,8.117 L2.2
  Bottom Layer w0.635: v1(26.924,6.604) 32.503,6.604 35.56,9.661 v1(35.56,12.954) 34.544,13.97 34.544,16.256 v1(35.56,17.272)
VUSB: C3.1 C5.1 J1.A4_B9 J1.B4_A9 U1.3 U2.36 | length 39.2
  Top Layer w0.2: J1.B4_A9 7.353,7.194 5.822,7.194 5.242,7.774 5.242,9.92 6.92,11.598 J1.A4_B9@7.549,11.598 ; v1(29.544,11.002) U2.36
  Top Layer w0.635: J1.A4_B9 7.566,11.816 8.017,11.816 8.032,11.831 8.52,11.831 10.165,13.476 U1.3 18.147,13.469 22.779,13.469 22.881,13.571 22.931,13.571 23.114,13.754 C5.1
  Bottom Layer w0.2: v1(21.082,13.462) 22.737,15.117 26.262,15.117 29.544,11.835 v1(29.544,11.002) 31.448,11.002 C3.1
pads on no net: C2.2 J1. J1.A8 J1.B8 J5. J5.A5 J5.A6 J5.A7 J5.A8 J5.B5 J5.B6 J5.B7 J5.B8 T1.3 T1.4 U2.2 U2.3 U2.4 U2.5 U2.6 U2.14 U2.15 U2.16 U2.17 U2.25 U2.26 U2.27 U2.28 U2.31 U2.38 U2.40 U2.41 U2.42 U2.43 U2.45 U2.46

## Polygon pours and split planes (outlines as drawn)
GND on Bottom Layer "GND_L02_P001" (solid, remove dead copper, pour order 1): 0,45.212 128.016,45.212 128.016,0 0,0
GND on Top Layer "GND_L01_P000" (solid, remove dead copper, pour order 0): 0,45.212 128.016,45.212 128.016,0 0,0

## Silkscreen, mask and mechanical layers (free items; w line width, h text height)
Top Overlay:
  drawing of 12 lines, arcs and shapes, not listed
  text "26/09/2023 / Version:V1.0.0" at 102.108,0.508 h1.52